# Altium PCB PCB2.PcbDoc
Units mm, origin at the board's own origin, x right, y up, seen from the top; angles counter-clockwise.
Board outline 65.53 x 45.59 mm, 2 copper layers (Top Layer, Bottom Layer); 15 components, 40 nets, 39 pads, 2 vias.
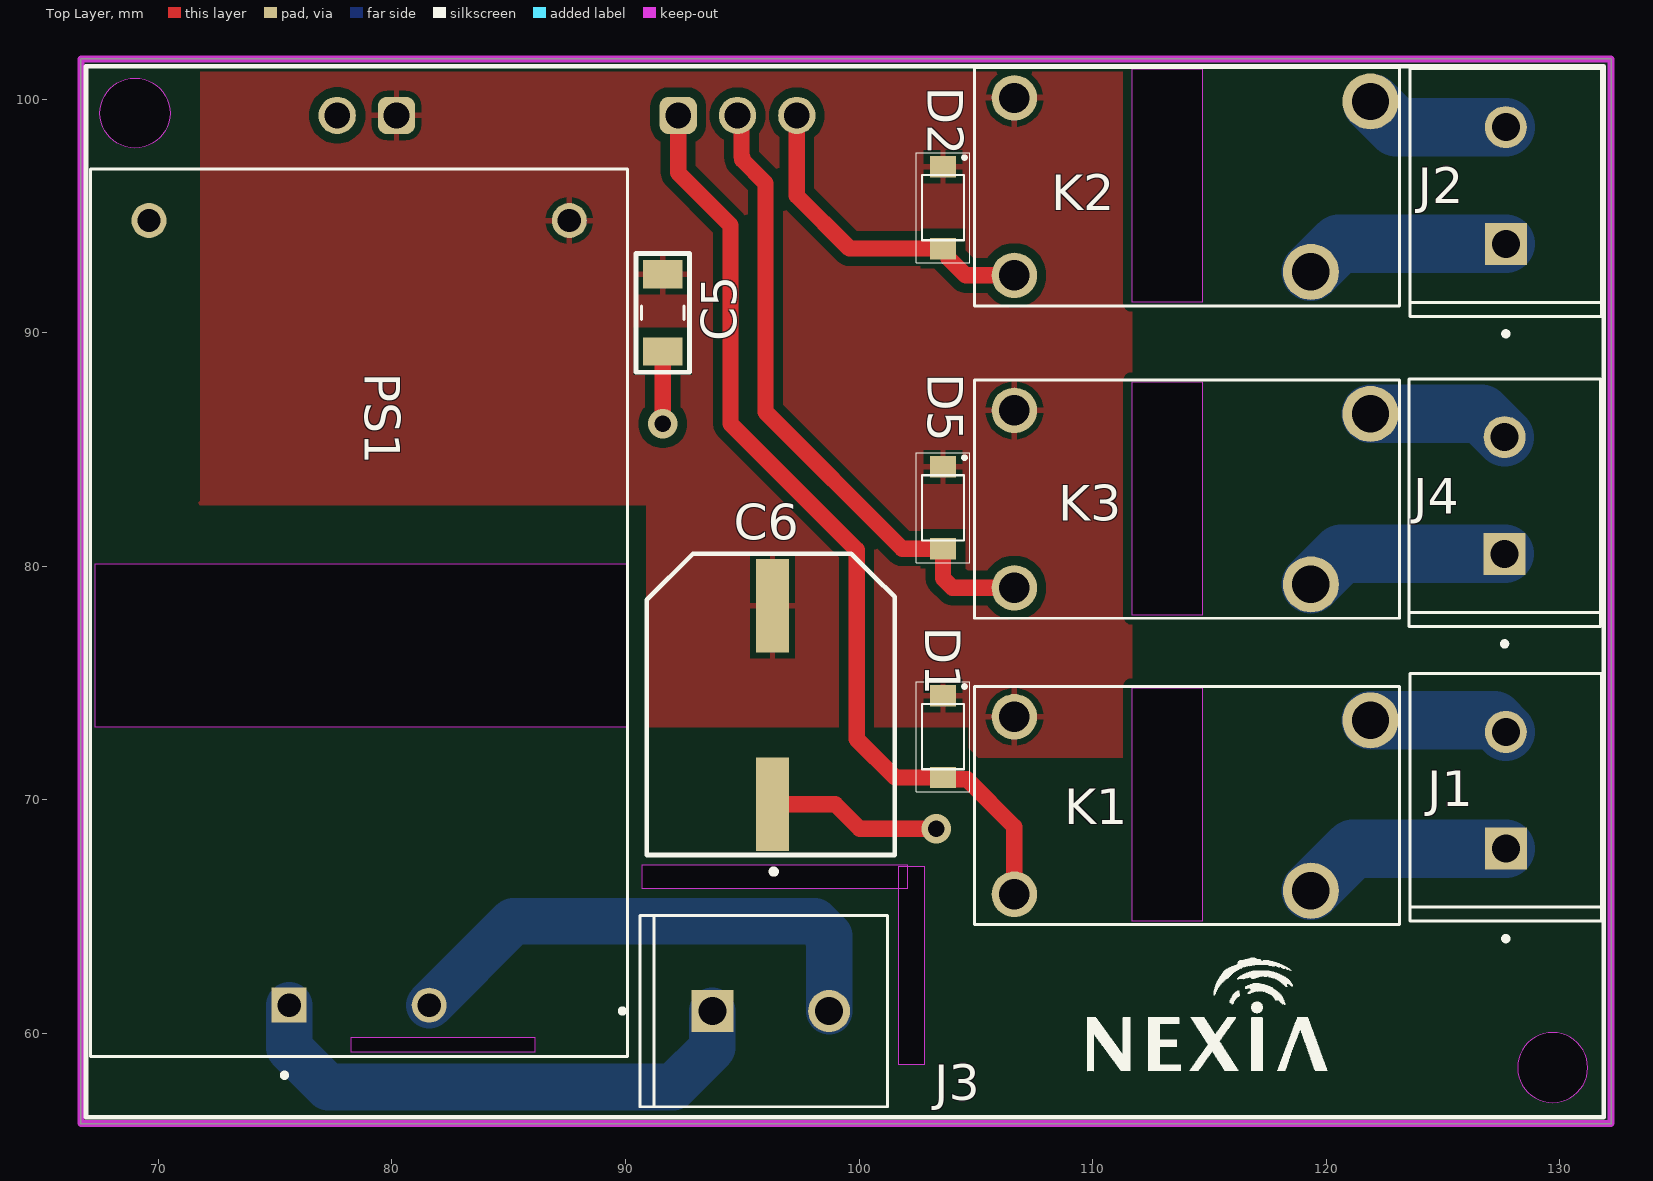
[diagram p0: Top Layer view]
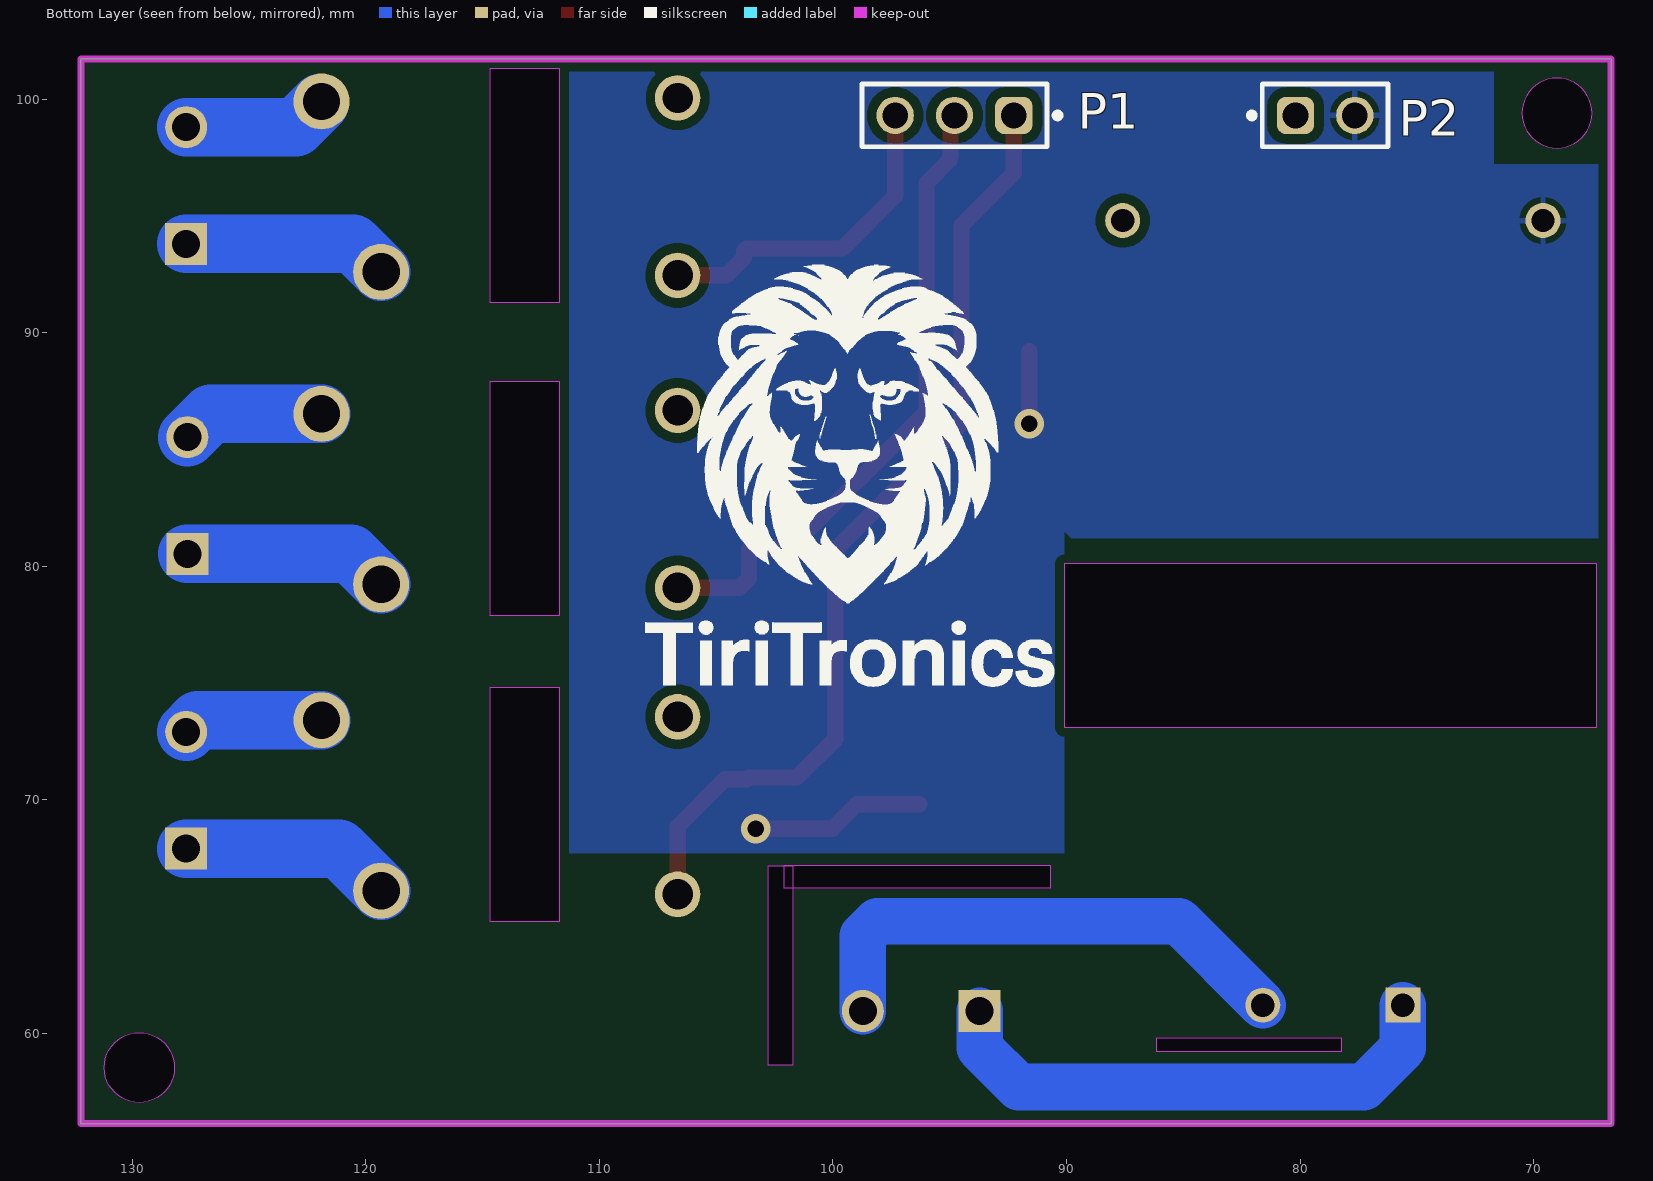
[diagram p1: Bottom Layer view, seen from below]
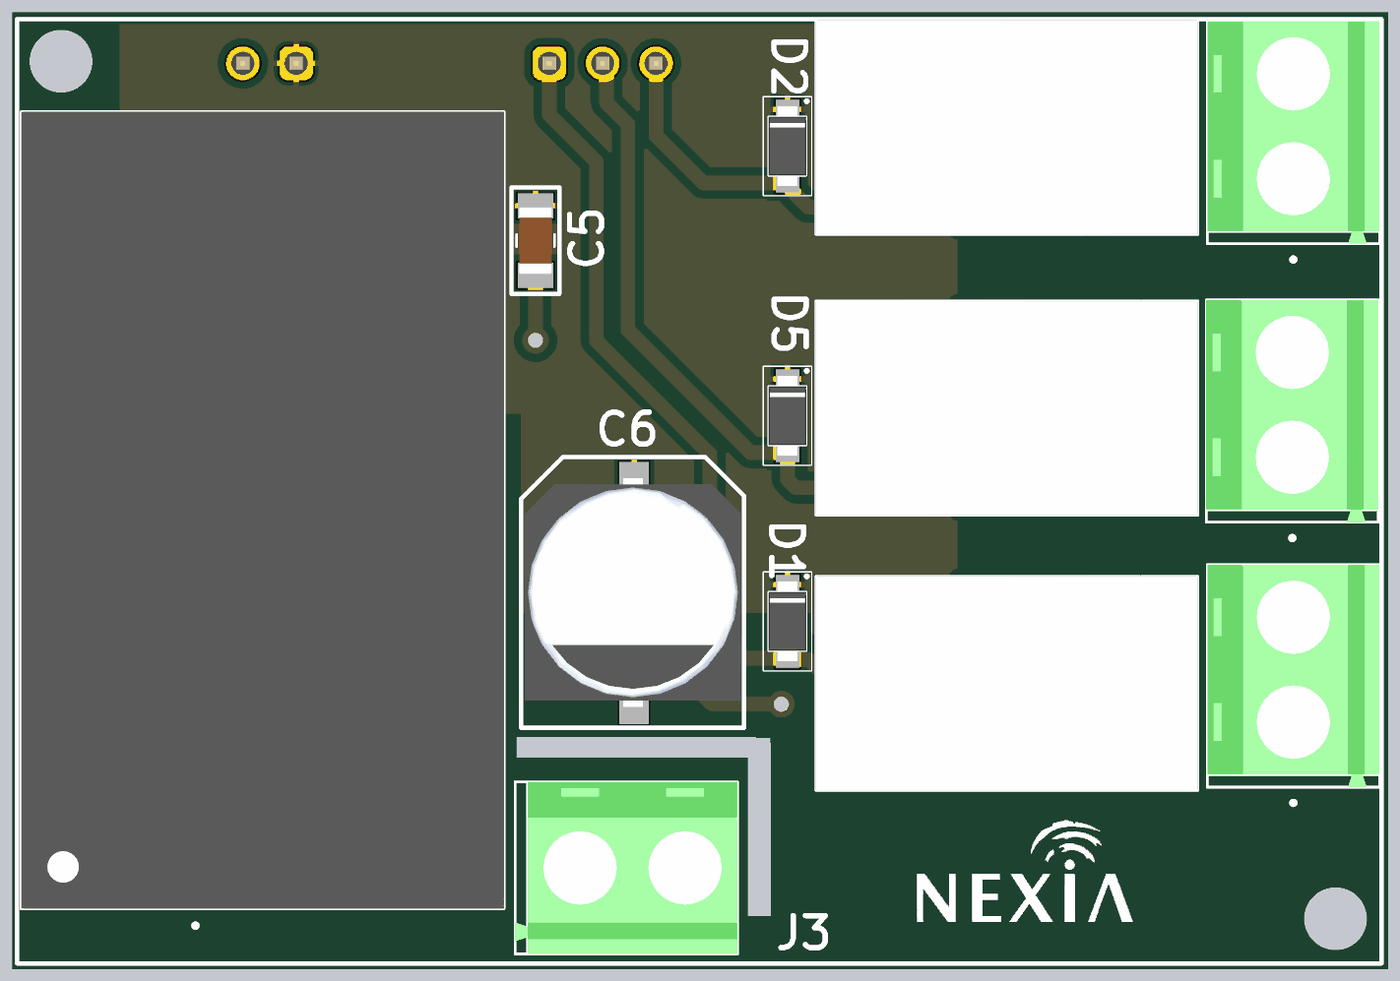
[diagram p2: 3D render of the assembled board from above, using the file's embedded part models]

## Layer stack, top to bottom
Top Solder: solder mask 0.0102, Solder Resist, Dk 3.5
Top Layer: signal copper 0.0356
Dielectric 1: dielectric 0.32, FR-4, Dk 4.8
Bottom Layer: signal copper 0.0356
Bottom Solder: solder mask 0.0102, Solder Resist, Dk 3.5

## Board outline
66.675,56.134 132.207,56.134 132.207,101.727 66.675,101.727
cut-out: 111.694,91.302 111.694,101.302 114.694,101.302 114.694,91.302
cut-out: 67.294,80.102 90.094,80.102 90.094,73.102 67.294,73.102
cut-out: 101.694,58.652 101.694,67.152 102.794,67.152 102.794,58.652
cut-out: 78.244,59.202 86.144,59.202 86.144,59.802 78.244,59.802
cut-out: 111.694,77.902 111.694,87.902 114.694,87.902 114.694,77.902
cut-out: 90.694,66.202 102.094,66.202 102.094,67.202 90.694,67.202
cut-out: 111.694,64.802 111.694,74.802 114.694,74.802 114.694,64.802
cut-out: 68.994,97.902 cw(c68.994,99.402) 67.494,99.402 cw(c68.994,99.402) 68.994,100.902 cw(c68.994,99.402) 70.494,99.402 cw(c68.994,99.402)
cut-out: 128.201,58.531 ccw(c129.701,58.531) 129.701,57.031 ccw(c129.701,58.531) 131.201,58.531 ccw(c129.701,58.531) 129.701,60.031 ccw(c129.701,58.531)

## Design rules (kind name [scope] priority, off if disabled: settings)
Clearance [All] p1: gap=0.4 ignorepadtopadclearanceinfootprint=FALSE
PolygonConnect [All] p1: thpad.connectstyle=Relief thpad.reliefconductorwidth=0.254 thpad.reliefentries=4 thpad.polygonreliefangle="90 Angle" thpad.airgapwidth=0.254 smdpad.connectstyle=Relief smdpad.reliefconductorwidth=0.254 smdpad.reliefentries=4 smdpad.polygonreliefangle="90 Angle" smdpad.airgapwidth=0.254 via.connectstyle=Direct via.reliefconductorwidth=0.254 via.reliefentries=4 via.polygonreliefangle="90 Angle" via.airgapwidth=0.254
RoutingVias [All] p1: holewidth=0.711 width=1.27 viastyle="Through Hole" minholewidth=0.711 minwidth=1.27 maxholewidth=0.711 maxwidth=1.27
SolderMaskExpansion [All] p1: expansion=0.102 istentingtop=FALSE
SupplyNets "Schematic Supply Nets_2" [InNet('GND')] p1: voltage=0.000
SupplyNets "Schematic Supply Nets_1" [InNet('+5')] p2: voltage=0.000
SupplyNets "Schematic Supply Nets" [InNet('3.3V')] p3: voltage=0.000
UnRoutedNet [All] p1: checkbadconnections=TRUE
Width [All] p1: maxlimit=2.5 minlimit=0.5 preferedwidth=0.7
29 further rules are at their usual default settings.

## Components (designator, comment, footprint, x,y, rotation, side; value= is the part's Value field where it differs from the comment)
C5 "100nf" CL31B104KCFNNNE 91.594,90.877 r90 top
C6 "330uF" UCL1V331MNL1GS 96.294,78.302 r270 top
D1 "diode" 1N4007W 103.594,72.702 r270 top
D2 "diode" 1N4007W 103.594,95.352 r270 top
D5 "diode" 1N4007W 103.594,82.502 r270 top
J1 "CH1" KF127-5.0-2P 127.745,70.478 r90 top
J2 "CH3" KF127-5.0-2P 127.745,96.378 r90 top
J3 "AC" KF127-5.0-2P 96.294,60.902 r0 top
J4 "CH2" KF127-5.0-2P 127.694,83.102 r90 top
K1 "PR8-5V-450-1A" PR8-5V-450-1A 113.694,70.082 r0 top
K2 "PR8-5V-450-1A" PR8-5V-450-1A 113.694,96.582 r0 top
K3 "PR8-5V-450-1A" PR8-5V-450-1A 113.694,83.202 r0 top
P1 "61300311121" 61300311121 94.794,99.302 r0 bottom
P2 "61300211121" 61300211121 78.924,99.302 r180 bottom
PS1 "HLK-5M05" HLK-5M05 78.594,78.002 r90 top

## Footprints (in the part's own frame and the unit in brackets; to place one, negate y for a bottom-side part, rotate by r counter-clockwise, add the part's x,y. Pads: shape width x height; smd on the part's side, far side on the other; paste and mask are expansions set on the pad)
1N4007W [mm]
  rect 0.92x1.13 smd: 1(-1.75,0) 2(1.75,0)
  silkscreen extent -2.36,-1.15 2.36,1.15, body extent -1.9,-0.9 1.9,0.9, height 1.31
61300211121 [mm] "Pin Header, pitch 2.54 mm, THT, Vertical, single row, 2p"
  rrect50% 1.6x1.6 hole 1.1: 1(-1.27,0)
  round 1.6 hole 1.1: 2(1.27,0)
  silkscreen extent -3.26,-1.35 2.69,1.35, body extent -2.54,-1.27 2.54,1.27, height 8.57
61300311121 [mm] "Pin Header, pitch 2.54 mm, THT, Vertical, single row, 3p"
  rrect50% 1.6x1.6 hole 1.1: 1(-2.54,0)
  round 1.6 hole 1.1: 2(0,0) 3(2.54,0)
  silkscreen extent -4.53,-1.35 3.96,1.35, body extent -3.81,-1.27 3.81,1.27, height 8.57
CL31B104KCFNNNE [mm]
  rect 1.2x1.7 smd: 1(-1.675,0) 2(1.625,0)
  silkscreen extent -2.57,-1.14 2.51,1.14, body extent -1.63,-0.8 1.57,0.8, height 1.4
HLK-5M05 [mm]
  rect 1.5x1.5 / inner round 1.5 / far side rect 1.5x1.5 hole 1: 1(-16.8,3)
  round 1.5 hole 1: 2(-16.8,-3) 3(16.8,9) 4(16.8,-9)
  silkscreen extent -19.9,-11.5 19,11.5, body extent -19,-11.5 19,11.5, height 18.1
KF127-5.0-2P [mm]
  rect 1.8x1.8 / inner round 1.8 / far side rect 1.8x1.8 hole 1.2: 1(-2.576,0.051)
  round 1.8 hole 1.2: 2(2.424,0.051)
  silkscreen extent -6.53,-4.05 4.92,4.15, body extent -5.68,-4.05 4.92,4.15, height 10
PR8-5V-450-1A [mm]
  round 1.95 hole 1.3: A1(-7.044,3.47) A2(-7.044,-4.13)
  round 2.4 hole 1.6: COM(5.656,-3.98) NO(8.206,3.32)
  silkscreen extent -8.74,-5.43 9.46,4.77, body extent -8.74,-5.43 9.46,4.77, height 15.2
UCL1V331MNL1GS [mm]
  rect 4x1.4 smd: 1(0,0) 2(8.5,0)
  silkscreen extent -2.24,-5.38 11.47,5.23, body extent -1.23,-5.21 9.67,5.09, height 10.59

## Part data
C5: library part CL31B104KCFNNNE, "0.1 µF ±10% 100V Ceramic Capacitor X7R 1206 (3216 Metric)", ComponentLink1Description=Link, ComponentLink1URL=https://www.digikey.com/en/products/detail/samsung-electro-mechanics/CL31B104KCFNNNE/3886809, P/N=1276-1151-6-ND
C6: library part UCL1V331MNL1GS, "330 µF 35 V Aluminum Electrolytic Capacitors Radial, Can - SMD 2000 Hrs @ 105°C", ComponentLink1Description=Link, ComponentLink1URL=https://www.digikey.com/en/products/detail/nichicon/UCL1V331MNL1GS/2300308, P/N=493-3959-6-ND
D1 D2 D5: library part 1N4007W, "Diode 1000 V 1A Surface Mount SOD-123FL", ComponentLink1Description=Link, ComponentLink1URL=https://www.digikey.com/en/products/detail/evvo/1N4007W/21407138, P/N=5272-1N4007WDKR-ND
J1 J2 J3 J4: library part KF127-5.0-2P, "Connector, Terminal Block; Wire Receptacle; 2 Pos.; 16-30 AWG; 0.197 in. CL; Sid", ComponentLink1Description=Link, ComponentLink1URL=https://makerselectronics.com/product/kf127-5-0-2p-green-terminal-block
K1 K2 K3: "18.2 x 10.2 x 15.5 mm, 5 V, 16 A, SPST (1 Form A), Power Relay", ComponentLink1Description="Makers Link", ComponentLink1URL=https://makerselectronics.com/product/fanhar-relay-fh17-1a2tle
P1: "WR-PHD Pin Header, THT, Vertical, pitch 2.54mm, 1 Row, 3P", Contact Resistance=20mOhm, Manufacturer="Wurth Elektronik", Operating Temperature Max=105°C, Operating Temperature Min=-40°C, Rated Current=3A, Withstanding Voltage=500V, Working Voltage=250V, Category="Board-to-Board Connectors", ComponentLink1Description="Website Link", ComponentLink1URL=https://www.we-online.com/redexpert/article/61300311121?ad, ComponentLink2Description="Datasheet Link", ComponentLink2URL=https://www.we-online.com/redexpert/spec/61300311121?ad, Gender="Pin Header", Manufacturer Part Number=61300311121, Match Code=WR-PHD, Mount="Through Hole", Number of Pins=3, Number of Rows=1, Orientation=Vertical, Packaging=Bag, Pitch=2.54mm
P2: "WR-PHD Pin Header, THT, Vertical, pitch 2.54mm, 1 Row, 2P", Contact Resistance=20mOhm, Manufacturer="Wurth Elektronik", Operating Temperature Max=105°C, Operating Temperature Min=-40°C, Rated Current=3A, Withstanding Voltage=500V, Working Voltage=250V, Category="Board-to-Board Connectors", ComponentLink1Description="Website Link", ComponentLink1URL=https://www.we-online.com/redexpert/article/61300211121?ad, ComponentLink2Description="Datasheet Link", ComponentLink2URL=https://www.we-online.com/redexpert/spec/61300211121?ad, Gender="Pin Header", Manufacturer Part Number=61300211121, Match Code=WR-PHD, Mount="Through Hole", Number of Pins=2, Number of Rows=1, Orientation=Vertical, Packaging=Bag, Pitch=2.54mm
PS1: "AC DC 220V to 5V 5W 5Watt Isolated Switching Step-Down Power Supply Module Converter", ComponentLink1Description=Link, ComponentLink1URL=https://makerselectronics.com/product/hlk-5m05-ac-dc-power-module

## Via types
v1: diameter 1.27/1.27 (per signal layer), hole 0.711, Top Layer to Bottom Layer, tented both sides, 1 vias
v2: diameter 1.27, hole 0.711, Top Layer to Bottom Layer, tented both sides, 1 vias

## Nets (pads, with @x,y where several pads share a name; then routed paths per layer and width w, separated by ;. In a path a pad name is that pad's centre, name@x,y a point inside that pad or via, vN(x,y) a via of type N, cw(c..) or ccw(c..) an arc to the next point about the centre after c; other vN are vias at no path point)
3.3V: 
+5: C5.2 C6.1 D1.1 D2.1 D5.1 K1.A1 K2.A1 K3.A1 P2.1 PS1.4 | length 0.1
  Bottom Layer w0.7: PS1.4 PS1.4@87.644,94.752
CH1: 
CH1_P_FEMALE: 
CH1_P_MALE: D1.2 K1.A2 P1.1 | length 41.1
  Top Layer w0.7: P1.1 92.254,96.842 94.494,94.602 94.494,86.102 99.894,80.702 99.894,72.602 101.544,70.952 D1.2 103.674,70.872 104.624,70.872 106.65,68.846 K1.A2
CH2: 
CH2_P_FEMALE: 
CH2_P_MALE: D5.2 K3.A2 P1.2 | length 27.7
  Top Layer w0.7: P1.2 94.966,99.13 94.966,97.53 94.994,97.502 94.994,97.402 95.994,96.402 95.994,86.602 101.844,80.752 D5.2 103.594,79.482 104.004,79.072 K3.A2
CH3: 
CH3_P_FEMALE: 
CH3_P_MALE: D2.2 K2.A2 P1.3 | length 14.3
  Top Layer w0.7: P1.3 97.334,95.862 99.594,93.602 103.699,93.602 103.809,93.492 103.809,93.212 104.569,92.452 K2.A2
EN: 
GND: C5.1 C6.2 P2.2 PS1.3 | length 3.1
  Top Layer w0.7: v1(91.594,86.102) C5.1
  other v2: 103.302,68.758
GPIO0: 
GPIO2: 
GPIO4: 
GPIO5: 
GPIO10: 
GPIO14: 
GPIO15: 
NetD3_2: 
NetD4_2: 
NetD6_2: 
NetJ1_1: J1.1 K1.COM | length 9.1
  Bottom Layer w2.5: K1.COM 121.15,67.902 J1.1
NetJ1_2: J1.2 K1.NO | length 6
  Bottom Layer w2.5: K1.NO 127.194,73.402 J1.2
NetJ2_1: J2.1 K2.COM | length 8.8
  Bottom Layer w2.5: K2.COM 120.55,93.802 J2.1
NetJ2_2: J2.2 K2.NO | length 6.1
  Bottom Layer w2.5: K2.NO@121.975,99.827 123,98.802 J2.2
NetJ3_1: J3.1 PS1.1 | length 22.9
  Bottom Layer w2: PS1.1 75.594,59.374 77.266,57.702 92.046,57.702 93.718,59.374 J3.1
NetJ3_2: J3.2 PS1.2 | length 22.1
  Bottom Layer w2: PS1.2 85.194,64.802 98.094,64.802 98.718,64.178 J3.2
NetJ4_1: J4.1 K3.COM | length 8.8
  Bottom Layer w2.5: K3.COM 120.654,80.526 J4.1
NetJ4_2: J4.2 K3.NO | length 6.2
  Bottom Layer w2.5: K3.NO 126.647,86.522 J4.2
NetQ1_B: 
NetQ2_B: 
NetQ3_B: 
NetR3_1: 
NetR4_1: 
NetR6_1: 
RST: 
RX: 
TX: 
copper on no net: | length 7.4
  Top Layer w0.7: 96.294,69.802 98.981,69.802 100.025,68.758 103.302,68.758

## Polygon pours and split planes (outlines as drawn)
GND on Bottom Layer "NONET_L-01_P-001" (solid, pour order 1): 111.294,101.302 111.294,67.702 90.094,67.702 90.094,81.502 89.794,81.202 66.994,81.202 66.994,97.102 66.894,97.202 71.694,97.202 71.694,101.302 111.194,101.302
+5 on Top Layer "NONET_L-01_P-001" (solid, pour order 0): 111.694,101.302 111.694,71.802 105.094,71.802 104.694,72.202 104.694,73.102 90.994,73.102 90.894,73.202 90.894,82.602 71.594,82.602 71.794,82.802 71.794,101.302 111.394,101.302

## Keep-outs
Keep-Out Layer:
  the board outline again, w0.3

## Silkscreen, mask and mechanical layers (free items; w line width, h text height)
Top Overlay:
  drawing of 14 lines, arcs and shapes, not listed
Bottom Overlay:
  drawing of 24 lines, arcs and shapes, not listed